# Allegro board SMA_fabA - Copy.brd
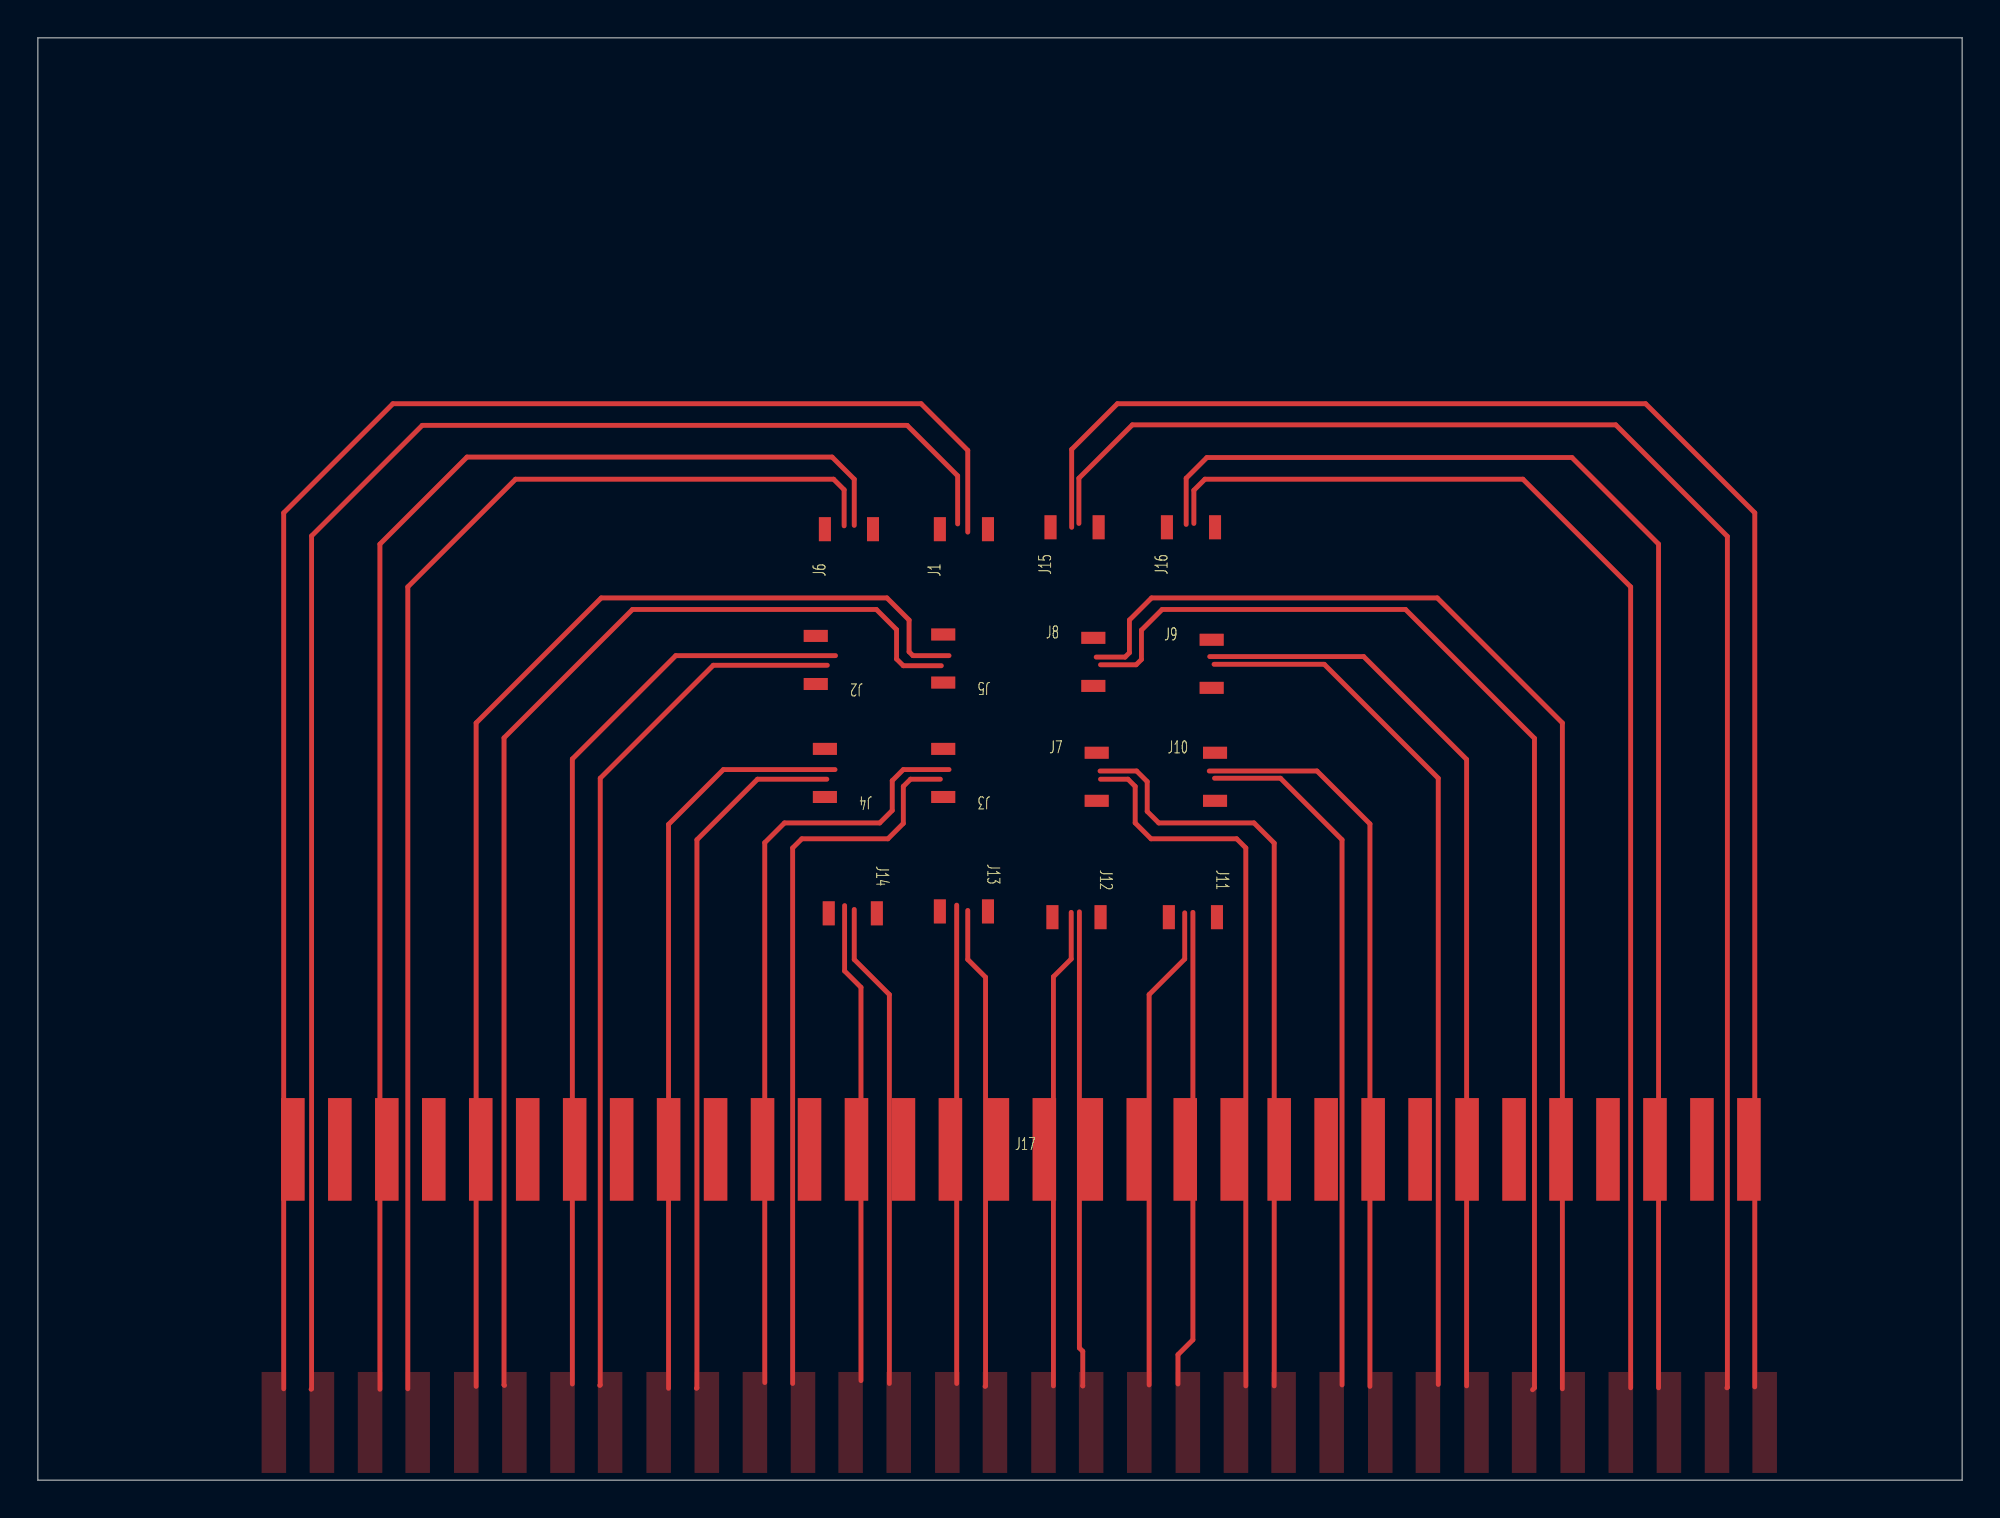
[diagram p0: board, top side]
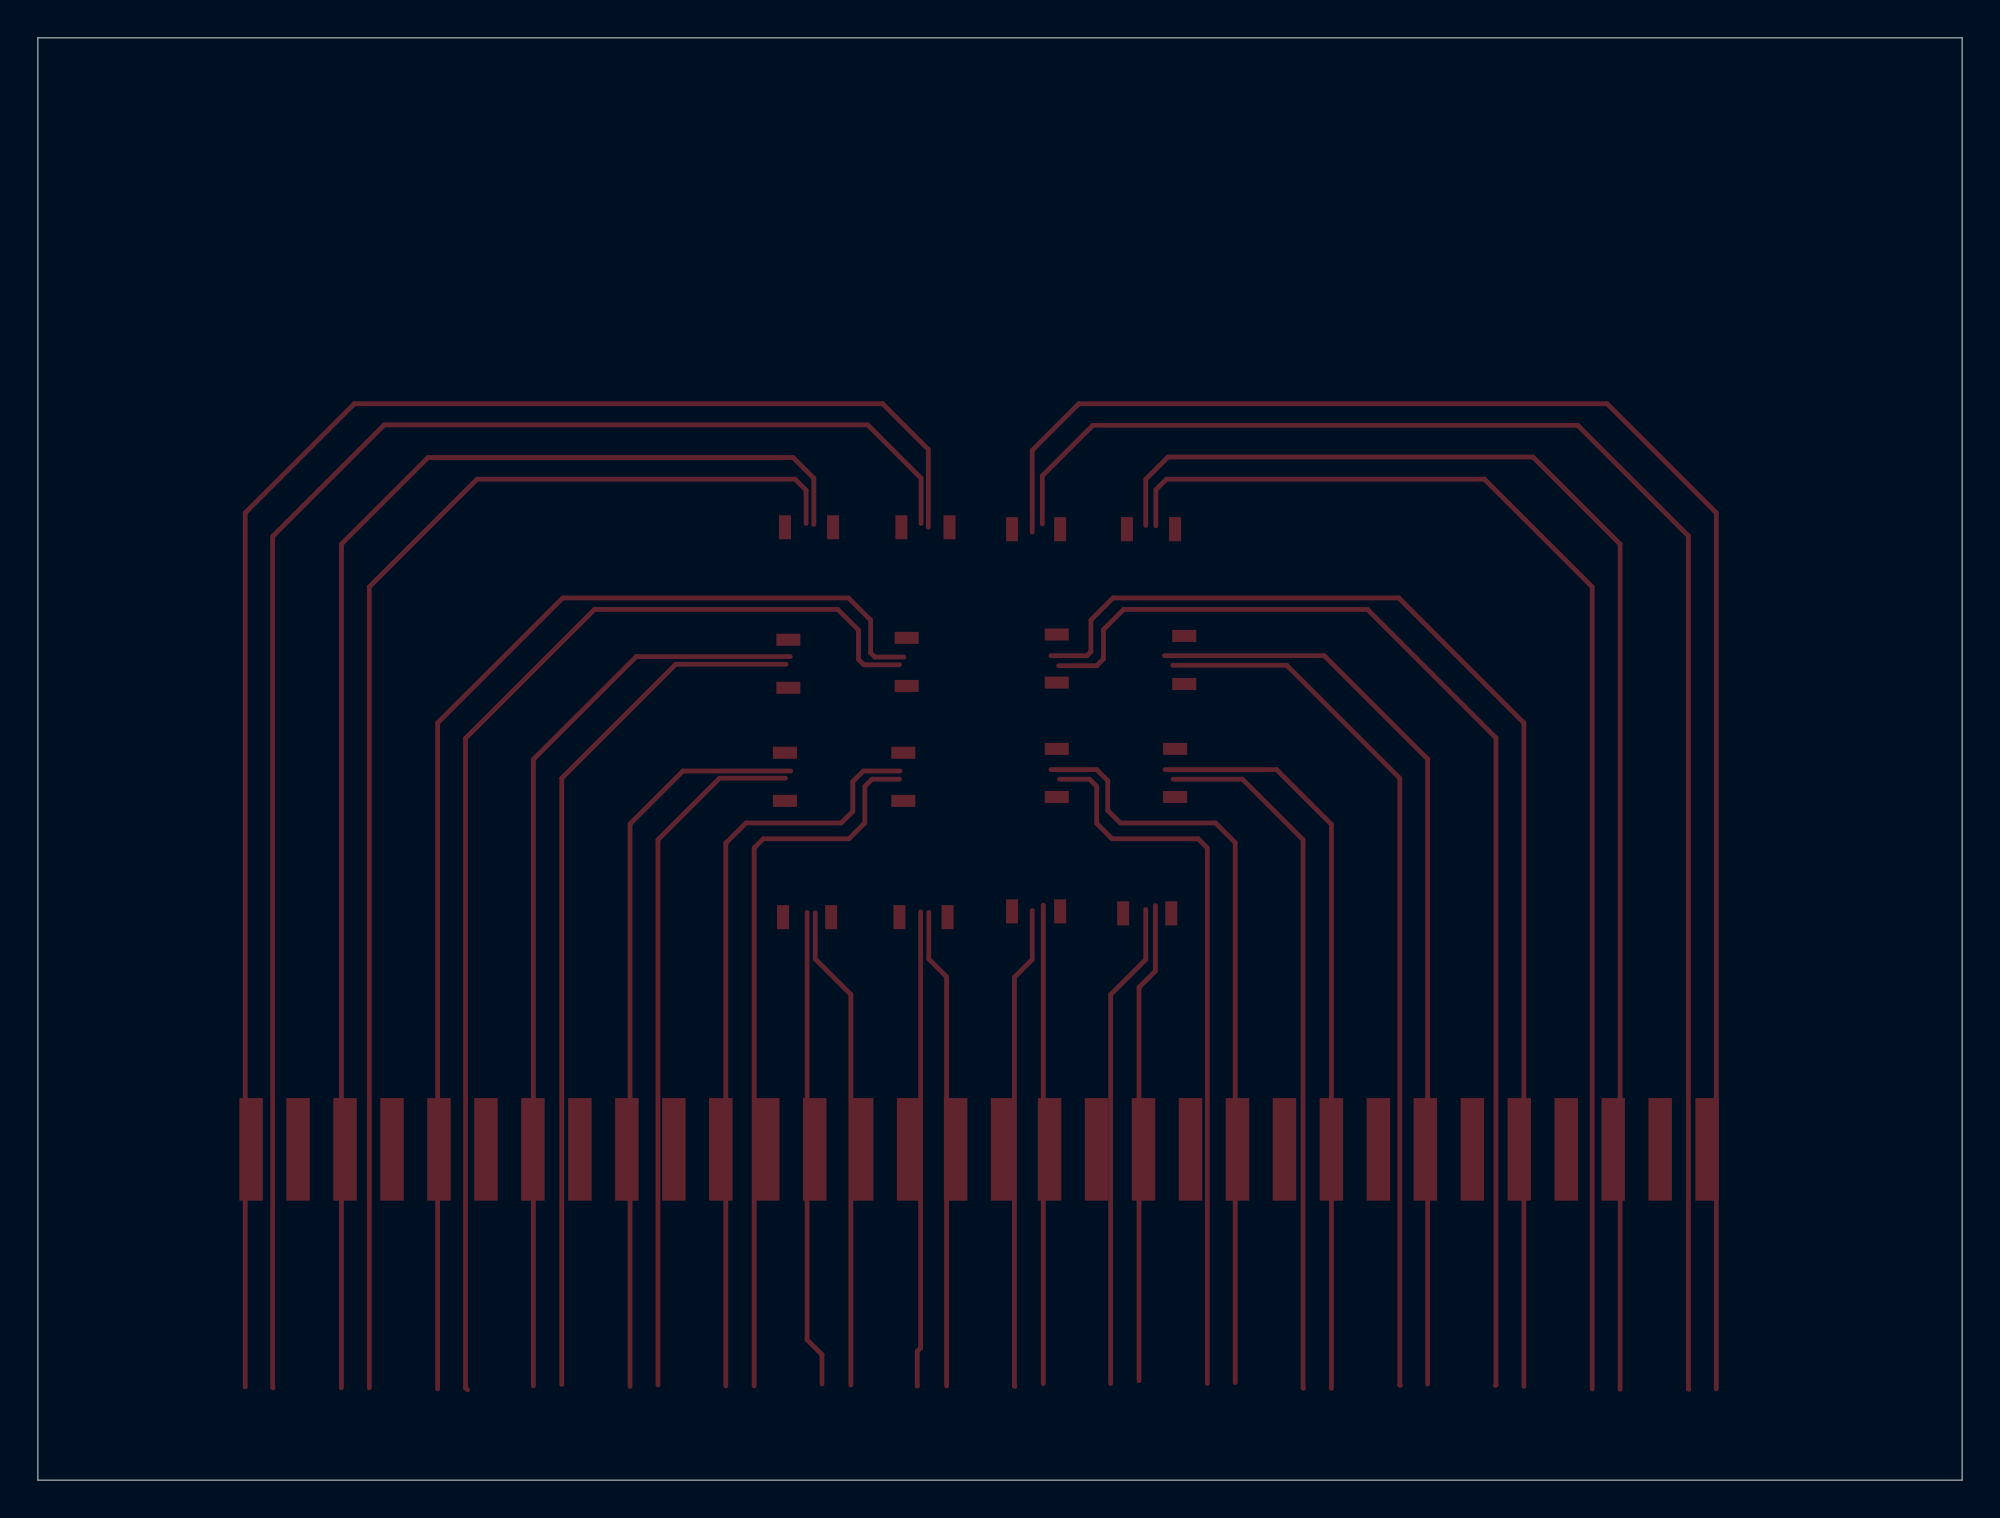
[diagram p1: board, bottom side, seen from below]

Outline 101.6 x 76.2 mm; copper layers: TOP, BOTTOM. Coordinates in mm from the lower left corner of the outline.
Outline path: 0,76.2 0,0 101.6,0 101.6,76.2 0,76.2

## Design rules (mm)
constraint set DEFAULT: min track width 0.127

## Placement (name value [footprint] x y rotation side)
J1  spiral_electrode  [SPRIAL_ELECTRODE]  47.62 47.7 90 top
J2  spiral_electrode  [SPRIAL_ELECTRODE]  43.61 42.06 180 top
J3  spiral_electrode  [SPRIAL_ELECTRODE]  50.34 36.09 180 top
J4  spiral_electrode  [SPRIAL_ELECTRODE]  44.09 36.09 180 top
J5  spiral_electrode  [SPRIAL_ELECTRODE]  50.34 42.14 180 top
J6  spiral_electrode  [SPRIAL_ELECTRODE]  41.55 47.7 90 top
J7  spiral_electrode  [SPRIAL_ELECTRODE]  53.37 38.43 0 top
J8  spiral_electrode  [SPRIAL_ELECTRODE]  53.19 44.5 0 top
J9  comb_electrode  [SPRIAL_ELECTRODE]  59.44 44.4 0 top
J10  comb_electrode  [SPRIAL_ELECTRODE]  59.61 38.43 0 top
J11  comb_electrode  [SPRIAL_ELECTRODE]  62.26 32.28 270 top
J12  comb_electrode  [SPRIAL_ELECTRODE]  56.11 32.28 270 top
J13  comb_electrode  [SPRIAL_ELECTRODE]  50.16 32.59 270 top
J14  comb_electrode  [SPRIAL_ELECTRODE]  44.3 32.49 270 top
J15  comb_electrode  [SPRIAL_ELECTRODE]  53.47 47.8 90 top
J16  comb_electrode  [SPRIAL_ELECTRODE]  59.61 47.8 90 top
J17  edge_connector  [EDGE_CONNECTOR]  -1.78 -7.92 0 top

## Library data of the parts
J1-J8 = spiral_electrode_0
J9-J16 = comb_electrode
J17 = edge_connector_2

## Footprints (pads in the part's own frame, mm; a bottom-side part is the same pattern mirrored in y, then rotated)
EDGE_CONNECTOR
  rect 1.24x5.42 smd: 1(15.24,25.4) 2(17.72,25.4) 3(20.2,25.4) 4(22.68,25.4) 5(25.16,25.4) 6(27.64,25.4) 7(30.12,25.4) 8(32.6,25.4) 9(35.08,25.4) 10(37.56,25.4) 11(40.04,25.4) 12(42.52,25.4) 13(45,25.4) 14(47.48,25.4) 15(49.96,25.4) 16(52.44,25.4) 17(54.92,25.4) 18(57.4,25.4) 19(59.88,25.4) 20(62.36,25.4) 21(64.84,25.4) 22(67.32,25.4) 23(69.8,25.4) 24(72.28,25.4) 25(74.76,25.4) 26(77.24,25.4) 27(79.72,25.4) 28(82.2,25.4) 29(84.68,25.4) 30(87.16,25.4) 31(89.64,25.4) 32(92.12,25.4)
SPRIAL_ELECTRODE
  rect 1.27x0.635 smd: 1(2.54,-2.54) 2(2.54,0)

## Nets
P0+: J13.1 J17.1
P0-: J13.2(-) J17.2
P1+: J14.1 J17.3
P1-: J14.2(-) J17.4
P2+: J15.1 J17.5
P2-: J15.2(-) J17.6
P3+: J16.1 J17.7
P3-: J16.2(-) J17.8
P4+: J9.1 J17.9
P4-: J9.2(-) J17.10
P5+: J10.1 J17.11
P5-: J10.2(-) J17.12
P6+: J11.1 J17.13
P6-: J11.2(-) J17.14
P7+: J12.1 J17.15
P7-: J12.2(-) J17.16
P8+: J5.1 J17.17
P8-: J5.2(-) J17.18
P9+: J6.1 J17.19
P9-: J6.2(-) J17.20(P9-)
P10+: J7.1 J17.21
P10-: J7.2(-) J17.22
P11+: J8.1 J17.23
P11-: J8.2(-) J17.24
P12+: J1.1 J17.25
P12-: J1.2(-) J17.26
P13+: J2.1 J17.27
P13-: J2.2(-) J17.28
P14+: J3.1 J17.29
P14-: J3.2(-) J17.30
P15+: J4.1 J17.31
P15-: J4.2(-) J17.32

## Routing (per net, layer and track width the routed paths; a pad name or vN(x,y) marks a point on that pad's centre or on a via; arc(x,y) is an arc through that point)
Net_33: length 89.7
  TOP w0.254: 54.58,50.34 54.58,54.46 57,56.87 84.89,56.87 90.65,51.1 90.65,4.93
Net_34: length 85.2
  TOP w0.254: 54.97,50.55 54.97,52.93 57.78,55.75 83.31,55.75 89.2,49.86 89.2,4.9 89.18,4.88
Net_35: length 74.3
  TOP w0.254: 60.63,50.5 60.63,52.93 61.72,54.03 81,54.03 85.57,49.45 85.57,4.88
Net_36: length 69.7
  TOP w0.254: 84.1,4.88 84.1,47.19 78.41,52.88 61.62,52.88 61.04,52.3 61.04,50.55
Net_37: length 64.8
  TOP w0.254: 55.88,43.48 57.4,43.48 57.63,43.71 57.63,45.44 58.8,46.61 73.89,46.61 80.49,40.01 80.49,4.83
Net_38: length 62.3
  TOP w0.254: 78.92,4.78 79.02,4.88 79.02,39.19 72.21,46 59.36,46 58.27,44.91 58.27,43.36 57.99,43.08 56.11,43.08
Net_39: length 48.9
  TOP w0.254: 75.44,4.98 75.44,38.07 70,43.51 61.87,43.51
Net_40: length 46.4
  TOP w0.254: 73.94,5.05 73.94,37.08 67.92,43.1 62.1,43.1
Net_41: length 39.4
  TOP w0.254: 61.85,37.47 67.54,37.47 70.33,34.67 70.33,4.95
Net_42: length 36.9
  TOP w0.254: 68.86,5.03 68.86,33.83 65.61,37.08 62.13,37.08
Net_43: length 40.4
  TOP w0.254: 56.08,37.47 58.01,37.47 58.57,36.91 58.57,35.33 59.18,34.72 64.21,34.72 65.28,33.66 65.28,4.98
Net_44: length 38.7
  TOP w0.254: 63.78,4.98 63.78,33.4 63.3,33.88 58.78,33.88 57.94,34.72 57.94,36.65 57.56,37.03 56.11,37.03
Net_45: length 25.2
  TOP w0.254: 60.99,30 60.99,7.42 60.2,6.63 60.2,5.08
Net_46: length 25.7
  TOP w0.254: 58.67,5.03 58.67,25.65 60.55,27.53 60.55,29.97
Net_47: length 25.1
  TOP w0.254: 55.17,4.98 55.17,4.98 55.17,6.81 54.99,6.99 54.99,30.02
Net_48: length 25.4
  TOP w0.254: 54.56,30 54.56,27.53 53.62,26.59 53.62,4.98
Net_49: length 25.5
  TOP w0.254: 50.01,4.95 50.04,4.98 50.04,26.57 49.1,27.51 49.1,30.1
Net_50: length 25.3
  TOP w0.254: 48.51,5.11 48.51,30.38
Net_51: length 25.8
  TOP w0.254: 43.1,30.15 43.1,27.51 44.96,25.65 44.96,5.11
Net_52: length 25.5
  TOP w0.254: 43.46,5.26 43.46,26.04 42.6,26.9 42.6,30.35
Net_53: length 38.7
  TOP w0.254: 47.65,37.03 46.08,37.03 45.69,36.65 45.69,34.7 44.88,33.88 40.34,33.88 39.85,33.4 39.85,5.11
Net_54: length 40.8
  TOP w0.254: 48.11,37.54 45.69,37.54 45.11,36.96 45.11,35.38 44.45,34.72 39.42,34.72 38.38,33.68 38.38,5.16
Net_55: length 37.2
  TOP w0.254: 41.66,37.03 38,37.03 34.8,33.83 34.8,4.88 34.77,4.85
Net_56: length 39.8
  TOP w0.254: 42.09,37.54 36.19,37.54 33.3,34.65 33.3,4.85
Net_57: length 46.6
  TOP w0.254: 41.68,43.05 35.66,43.05 29.69,37.08 29.69,5.03 29.67,5
Net_58: length 49.2
  TOP w0.254: 28.22,5.08 28.22,38.1 33.68,43.56 42.11,43.56
Net_59: length 62.3
  TOP w0.254: 47.7,43.03 45.69,43.03 45.34,43.38 45.34,44.93 44.27,46 31.39,46 24.61,39.22 24.61,5.03 24.64,5
Net_60: length 65
  TOP w0.254: 23.14,4.95 23.14,40.01 29.74,46.61 44.83,46.61 46,45.44 46,43.76 46.2,43.56 48.11,43.56
Net_61: length 90.1
  TOP w0.254: 49.1,50.09 49.1,54.41 46.63,56.87 18.75,56.87 12.98,51.1 12.98,4.83
Net_62: length 85.3
  TOP w0.254: 48.56,50.52 48.56,53.06 45.9,55.73 20.29,55.73 14.45,49.89 14.45,4.83 14.43,4.8
Net_63: length 69.9
  TOP w0.254: 42.57,50.42 42.57,52.32 42.01,52.88 25.22,52.88 19.53,47.19 19.53,4.83
Net_64: length 74.5
  TOP w0.254: 43.1,50.44 43.1,52.88 41.94,54.05 22.66,54.05 18.06,49.45 18.06,4.8

## Copper pours and planes (outline as drawn; the poured copper is in the pictures)
Net_33 on TOP: 91.82,0.38 91.82,5.72 90.53,5.72 90.53,0.38
Net_34 on TOP: 89.31,0.38 89.31,5.72 88.01,5.72 88.01,0.38
Net_35 on TOP: 86.77,0.38 86.77,5.72 85.47,5.72 85.47,0.38
Net_36 on TOP: 84.23,0.38 84.23,5.72 82.93,5.72 82.93,0.38
Net_37 on TOP: 81.69,0.38 81.69,5.72 80.39,5.72 80.39,0.38
Net_38 on TOP: 79.12,0.38 79.12,5.72 77.83,5.72 77.83,0.38
Net_39 on TOP: 76.61,0.38 76.61,5.72 75.31,5.72 75.31,0.38
Net_40 on TOP: 74.04,0.38 74.04,5.72 72.75,5.72 72.75,0.38
Net_41 on TOP: 71.53,0.38 71.53,5.72 70.23,5.72 70.23,0.38
Net_42 on TOP: 68.96,0.38 68.96,5.72 67.67,5.72 67.67,0.38
Net_43 on TOP: 66.42,0.38 66.42,5.72 65.13,5.72 65.13,0.38
Net_44 on TOP: 63.91,0.38 63.91,5.72 62.61,5.72 62.61,0.38
Net_45 on TOP: 61.37,0.38 61.37,5.72 60.07,5.72 60.07,0.38
Net_46 on TOP: 58.8,0.38 58.8,5.72 57.51,5.72 57.51,0.38
Net_47 on TOP: 56.26,0.38 56.26,5.72 54.97,5.72 54.97,0.38
Net_48 on TOP: 53.75,0.38 53.75,5.72 52.45,5.72 52.45,0.38
Net_49 on TOP: 51.18,0.38 51.18,5.72 49.89,5.72 49.89,0.38
Net_50 on TOP: 48.67,0.38 48.67,5.72 47.37,5.72 47.37,0.38
Net_51 on TOP: 46.1,0.38 46.1,5.72 44.81,5.72 44.81,0.38
Net_52 on TOP: 43.56,0.38 43.56,5.72 42.27,5.72 42.27,0.38
Net_53 on TOP: 41.05,0.38 41.05,5.72 39.75,5.72 39.75,0.38
Net_54 on TOP: 38.51,0.38 38.51,5.72 37.21,5.72 37.21,0.38
Net_55 on TOP: 35.97,0.38 35.97,5.72 34.67,5.72 34.67,0.38
Net_56 on TOP: 33.43,0.38 33.43,5.72 32.13,5.72 32.13,0.38
Net_57 on TOP: 30.86,0.38 30.86,5.72 29.57,5.72 29.57,0.38
Net_58 on TOP: 28.35,0.38 28.35,5.72 27.05,5.72 27.05,0.38
Net_59 on TOP: 25.81,0.38 25.81,5.72 24.51,5.72 24.51,0.38
Net_60 on TOP: 23.27,0.38 23.27,5.72 21.97,5.72 21.97,0.38
Net_61 on TOP: 13.11,0.38 13.11,5.72 11.81,5.72 11.81,0.38
Net_62 on TOP: 15.65,0.38 15.65,5.72 14.35,5.72 14.35,0.38
Net_63 on TOP: 20.7,0.38 20.7,5.72 19.41,5.72 19.41,0.38
Net_64 on TOP: 18.19,0.38 18.19,5.72 16.89,5.72 16.89,0.38
